# Altium PCB Sexy Rodent.PcbDoc (part 1 of 3)
Units mm, origin at the board's own origin, x right, y up, seen from the top; angles counter-clockwise.
Board outline 59.05 x 84.85 mm, 2 copper layers (Top Layer, Bottom Layer); 67 components, 41 nets, 178 pads, 206 vias.
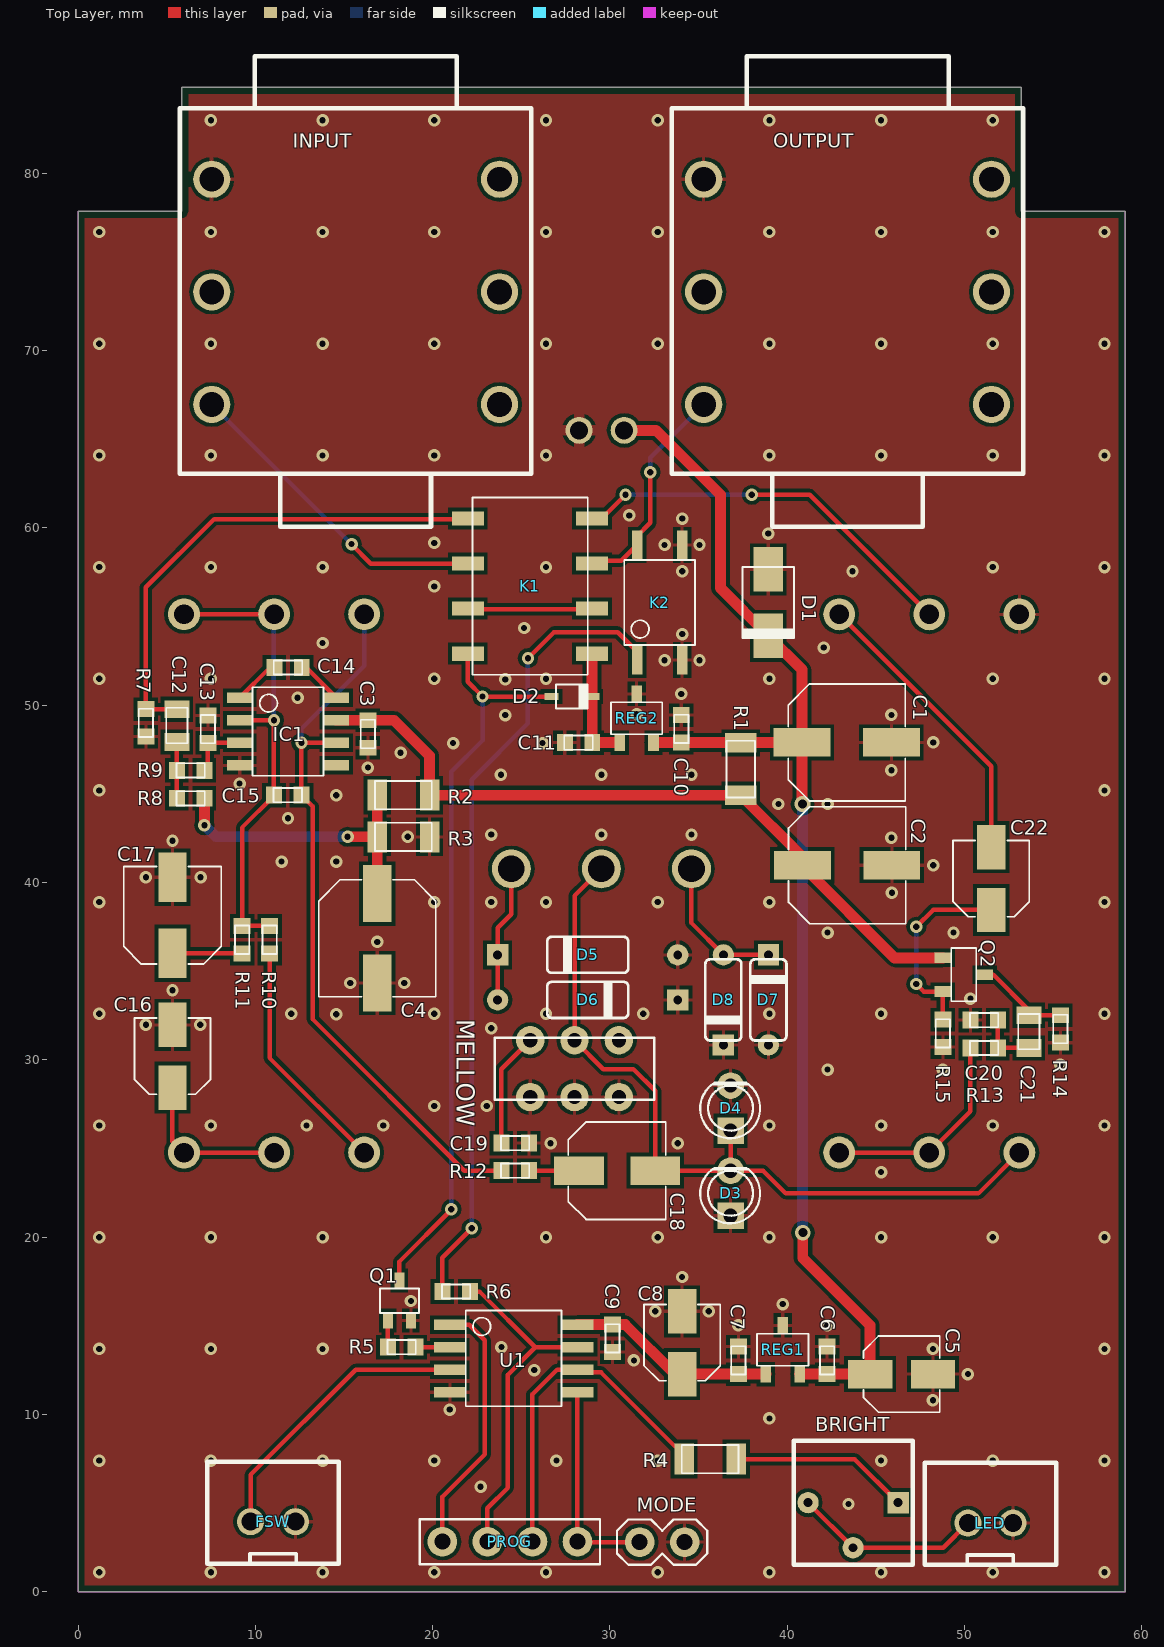
[diagram p0: Top Layer view]
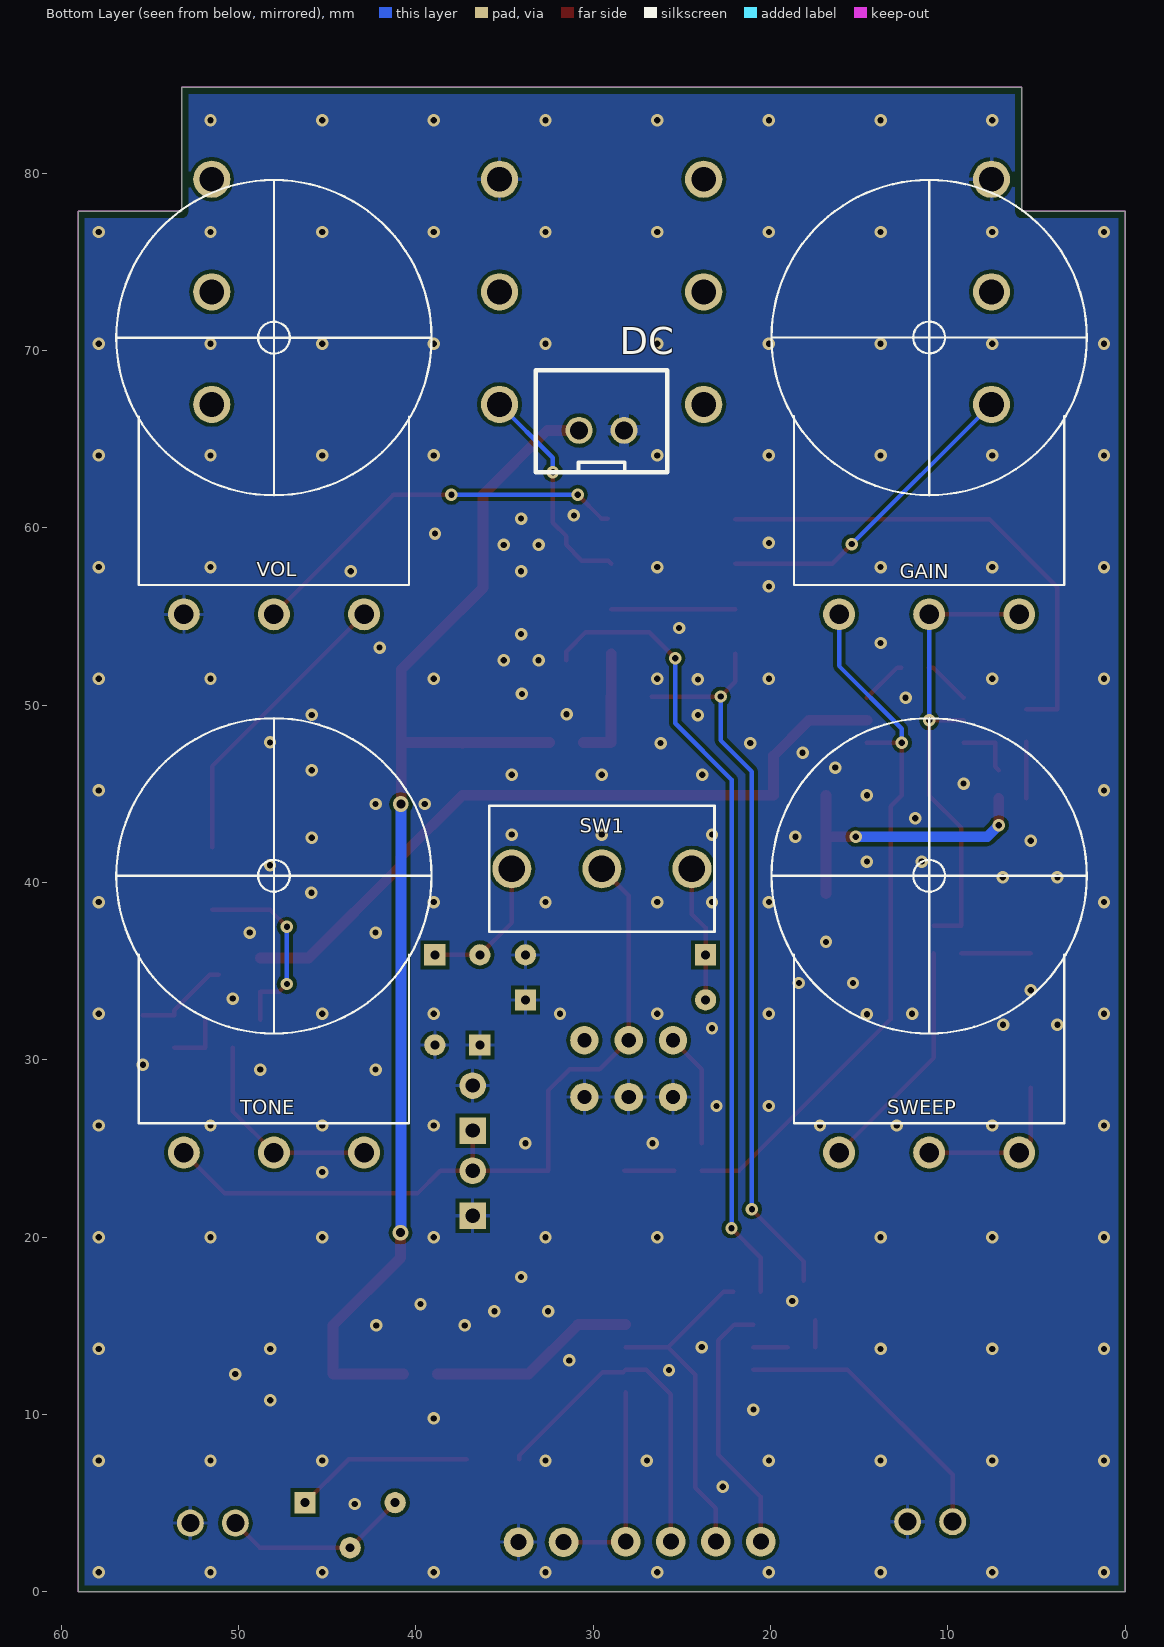
[diagram p1: Bottom Layer view, seen from below]
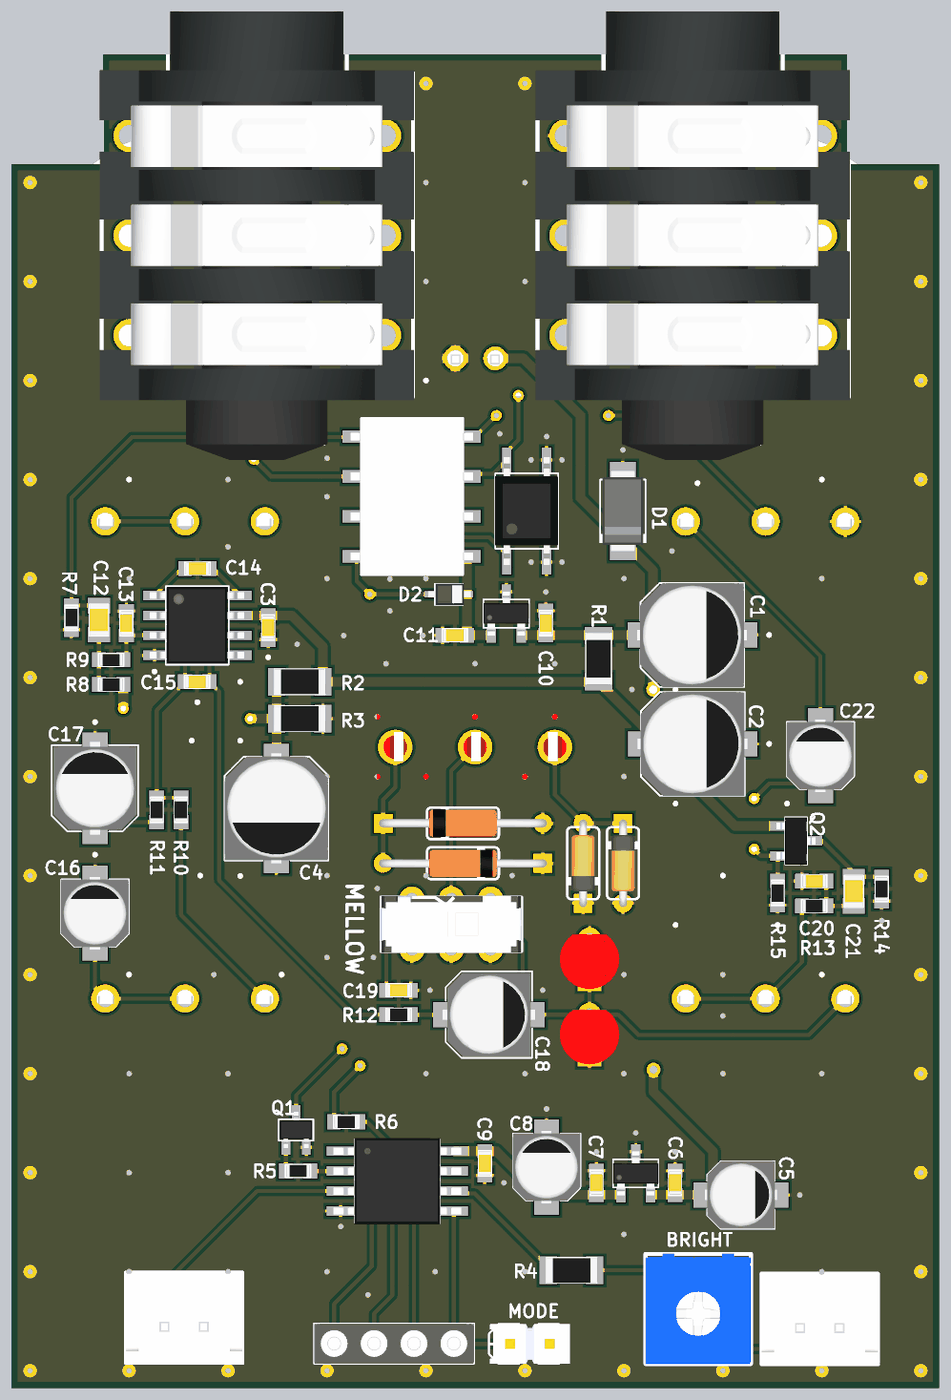
[diagram p2: 3D render of the assembled board from above, using the file's embedded part models]
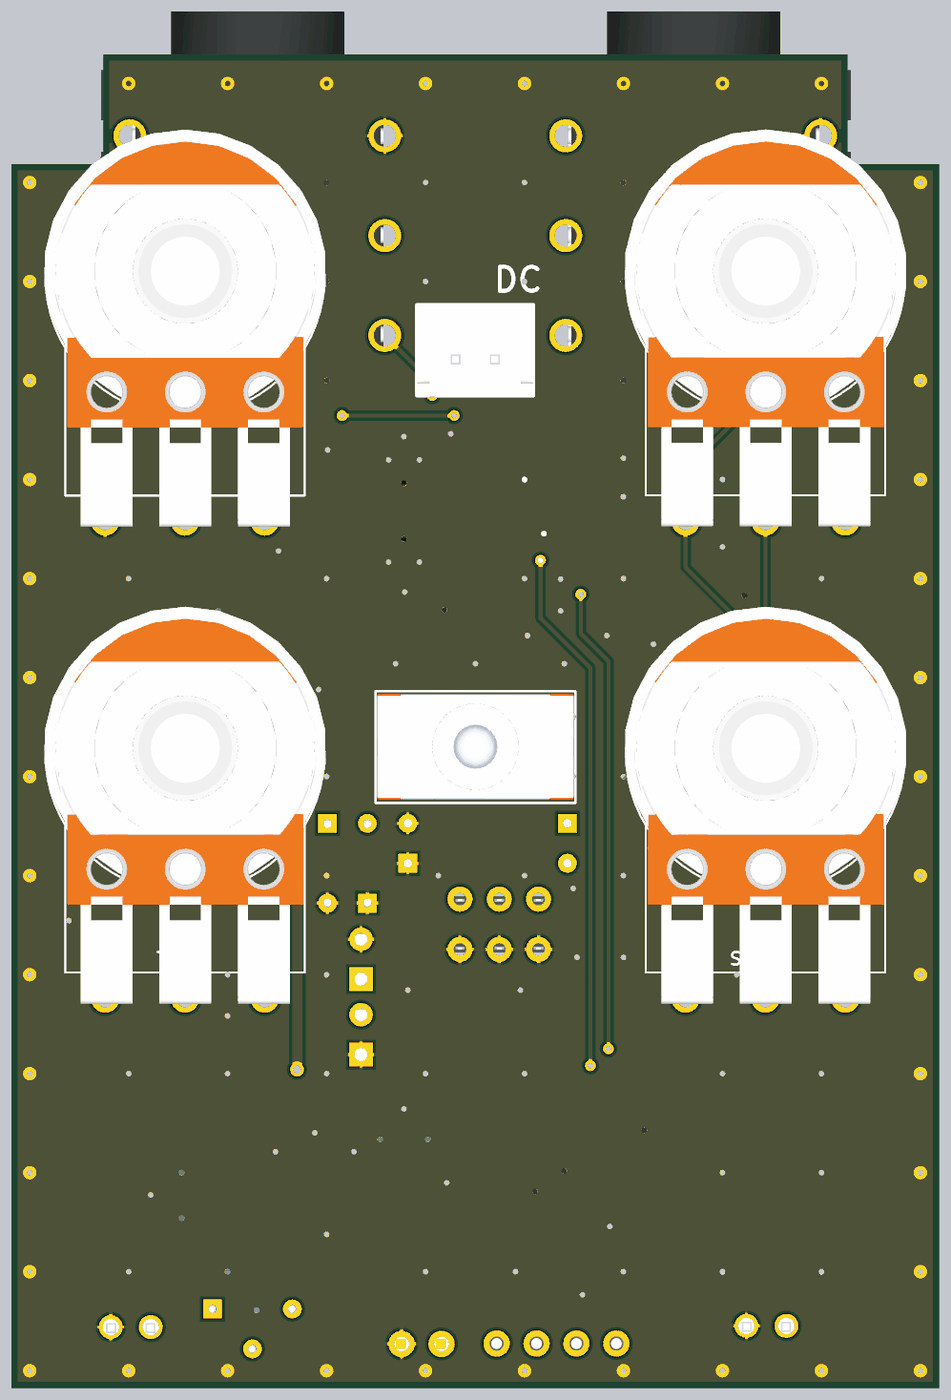
[diagram p3: 3D render of the assembled board from below, using the file's embedded part models]

## Layer stack, top to bottom
Top Solder: solder mask 0.0102, Solder Resist, Dk 3.5
Top Layer: signal copper 0.0356
Dielectric 1: dielectric 0.32, FR-4, Dk 4.8
Bottom Layer: signal copper 0.0356
Bottom Solder: solder mask 0.0102, Solder Resist, Dk 3.5

## Board outline
53.204,84.841 53.204,77.856 59.055,77.856 59.055,-0.011 0,-0.011 0,77.856 5.842,77.856 5.842,84.841

## Design rules (kind name [scope] priority, off if disabled: settings)
BoardOutlineClearance BottomOverlay [OnLayer('Bottom Overlay')] p1: gap=0 ignorepadtopadclearanceinfootprint=FALSE
BoardOutlineClearance TopOverlay [OnLayer('Top Overlay')] p2: gap=0 ignorepadtopadclearanceinfootprint=FALSE
BoardOutlineClearance [All] p3: gap=0.381 ignorepadtopadclearanceinfootprint=FALSE
Clearance [All] p1: gap=0.203 ignorepadtopadclearanceinfootprint=FALSE except(0: Arc-Text Arc-Hole Track-Text Track-Hole SMDPad-Text SMDPad-Hole THPad-Text THPad-Hole Via-Text Via-Hole Fill-Text Fill-Hole Poly-Text Poly-Hole Region-Text Region-Hole Text-Text Text-Hole)
ComponentClearance [All] p1 off: gap=0.025 collisioncheckmode=3 verticalgap=0.025 showdistances=FALSE
DiffPairsRouting [All] p1: maxlimit=10 minlimit=0.152 mostfreqgap=0.203 toplayer_minwidth=0.152 toplayer_maxwidth=0.381 toplayer_prefwidth=0.203 bottomlayer_minwidth=0.152 bottomlayer_maxwidth=0.381 bottomlayer_prefwidth=0.203 maxuncoupledlength=12.7
Height [All] p1 off: minheight=0 maxheight=25.4 prefheight=12.7
HoleSize [All] p1: absolutevalues=TRUE maxlimit=6.731 minlimit=0.3 maxpercent=80.000 minpercent=20.000
HoleToHoleClearance [All] p1: gap=0.254 allowstackedmicrovias=FALSE
MinimumAnnularRing [All] p1: minimumring=0.152
MinimumSolderMaskSliver [All] p1: minsoldermaskwidth=0
PlaneClearance [All] p1: clearance=0.254
PlaneConnect [All] p1: planeconnectstyle=Direct reliefexpansion=0.406 reliefentries=4 reliefconductorwidth=0.152 reliefairgap=0.152
PolygonConnect PolygonConnect_J1 [InComponent ('J1')  Or InComponent ('DC')] p1: connectstyle=Relief reliefconductorwidth=0.61 reliefentries=4 polygonreliefangle="90 Angle" airgapwidth=0.203
PolygonConnect [All] p2: thpad.connectstyle=Relief thpad.reliefconductorwidth=0.203 thpad.reliefentries=4 thpad.polygonreliefangle="90 Angle" thpad.airgapwidth=0.203 smdpad.connectstyle=Relief smdpad.reliefconductorwidth=0.203 smdpad.reliefentries=4 smdpad.polygonreliefangle="90 Angle" smdpad.airgapwidth=0.203 via.connectstyle=Direct via.reliefconductorwidth=0.203 via.reliefentries=4 via.polygonreliefangle="90 Angle" via.airgapwidth=0.203
RoutingCorners [All] p1: cornerstyle=45-Degree minsetback=1.25 maxsetback=1.25
RoutingVias [All] p1: holewidth=0.35 width=0.7 viastyle="Through Hole" minholewidth=0.35 minwidth=0.7 maxholewidth=2.54 maxwidth=2.896
SilkToSilkClearance [All] p1 off: silktosilkclearance=0
SilkToSolderMaskClearance [IsPad] p1 off: minsilkscreentomaskgap=0.152 clearancetoexposedcopper=TRUE
SolderMaskExpansion [All] p1: expansion=0.075
Width [All] p1: maxlimit=0.61 minlimit=0.254 preferedwidth=0.254 minimp=50.000000 maximp=50.000000 favimp=50.000000
19 further rules are at their usual default settings.

## Components (designator, comment, footprint, x,y, rotation, side; value= is the part's Value field where it differs from the comment)
BRIGHT "10kB" BOURNS_3362P 43.717,5.024 r180 top
C1 "100u" CAPAE_D 43.35,47.9 r0 top
C2 "100u" CAPAE_D 43.375,40.975 r0 top
C3 "100n" CHIP_0603 16.35,48.375 r270 top
C4 "47u" CAPAE_D 16.875,36.854 r270 top
C5 "10u" CAPAE_B 46.442,12.274 r0 top
C6 "100n" CHIP_0603 42.242,13.049 r90 top
C7 "100n" CHIP_0603 37.242,13.049 r90 top
C8 "10u" CAPAE_B 34.067,14.046 r90 top
C9 "100n" CHIP_0603 30.142,14.289 r270 top
C10 "100n" CHIP_0603 34.02,48.664 r90 top
C11 "100n" CHIP_0603 28.225,47.889 r180 top
C12 "22n" CHIP_0805 5.575,48.85 r90 top
C13 "1n" CHIP_0603 7.325,48.65 r90 top
C14 "30p" CHIP_0603 11.842,52.125 r180 top
C15 "100p" CHIP_0603 11.825,44.925 r180 top
C16 "2.2u" CAPAE_B 5.327,30.202 r90 top
C17 "4.7u" CAPAE_C 5.325,38.15 r90 top
C18 "4.7u" CAPAE_C 30.4,23.75 r0 top
C19 "10n" CHIP_0603 24.65,25.3 r0 top
C20 "3.3n" CHIP_0603 51.1,32.241 r180 top
C21 "22n" CHIP_0805 53.625,31.591 r270 top
C22 "1u" CAPAE_B 51.5,40.222 r90 top
D1 "S1A" DO214 38.925,55.789 r90 top
D2 "1N4148WS" SOD323 27.85,50.489 r180 top
D3 "D_LED" LED_3MM 36.8,22.475 r90 top
D4 "D_LED" LED_3MM 36.8,27.275 r90 top
D5 "1N34A" DO7_4 28.744,35.919 r0 top
D6 "1N34A" DO7_4 28.744,33.379 r180 top
D7 "1N4148" DO35_2 38.934,33.379 r270 top
D8 "1N4148" DO35_2 36.394,33.379 r90 top
DC "J_JST-XH-02" JST-XH-02 29.53,65.5 r180 bottom
FSW "J_JST-XH-02" JST-XH-02 10.997,3.949 r0 top
GAIN "100kA" ALPHA_16mm_BOTTOM 11.055,55.113 r180 bottom locked
IC1 "OP07" SO-8 11.842,48.514 r0 top
INPUT "J_STEREO" STEREO 15.656,73.309 r90 top locked
K1 "G6K" G6K 25.6,56.714 r180 top
K2 "TLP175A" TLP175A 32.8,55.789 r90 top
LED "J_JST-XH-02" JST-XH-02 51.455,3.874 r0 top
MELLOW "DPDT" DPDT_SLIDE 23.5,27.75 r0 top
MODE "" HEADER_2PINS 32.942,2.799 r0 top
OUTPUT "J_STEREO" STEREO 43.399,73.309 r90 top locked
PROG "J_HEADER_4PINS_FEM" HEADER_4Pins_FEM 21.817,2.824 r0 top
Q1 "MBT2222A" SOT323 18.125,16.425 r90 top
Q2 "MMBJ201" SOT23 49.95,34.8 r0 top
R1 "47R" CHIP_R_1206 37.375,46.4 r270 top
R2 "100k" CHIP_R_1206 18.35,44.925 r180 top
R3 "100k" CHIP_R_1206 18.35,42.575 r180 top
R4 "220R" CHIP_R_1206 35.651,7.482 r0 top
R5 "20k" CHIP_R_0603 18.25,13.8 r180 top
R6 "1k" CHIP_R_0603 21.32,16.932 r180 top
R7 "2.2M" CHIP_R_0603 3.825,49 r90 top
R8 "2.2M" CHIP_R_0603 6.35,44.75 r0 top
R9 "1k" CHIP_R_0603 6.35,46.325 r0 top
R10 "47R" CHIP_R_0603 10.8,36.775 r90 top
R11 "560R" CHIP_R_0603 9.25,36.775 r90 top
R12 "1k" CHIP_R_0603 24.65,23.75 r0 top
R13 "1.5k" CHIP_R_0603 51.1,30.666 r0 top
R14 "1M" CHIP_R_0603 55.4,31.739 r90 top
R15 "10k" CHIP_R_0603 48.775,31.489 r90 top
REG1 "78L05" SOT23-3 39.742,13.649 r90 top
REG2 "78L05" SOT23-3 31.5,49.264 r90 top
SW1 "SPDT" SPDT 29.515,40.772 r0 bottom locked
SWEEP "1kB" ALPHA_16mm_BOTTOM 11.055,24.754 r180 bottom locked
TONE "100kA" ALPHA_16mm_BOTTOM 48.006,24.754 r180 bottom locked
U1 "ATTINY85" SOP8 24.567,13.159 r0 top
VOL "100kA" ALPHA_16mm_BOTTOM 48.006,55.107 r180 bottom locked

## Footprints (in the part's own frame and the unit in brackets; to place one, negate y for a bottom-side part, rotate by r counter-clockwise, add the part's x,y. Pads: shape width x height; smd on the part's side, far side on the other; paste and mask are expansions set on the pad)
ALPHA_16mm_BOTTOM [mm]
  round 1.8 hole 1.1: 1(-5.08,0.016) 2(0,0.016) 3(5.08,0.016)
  silkscreen extent -8.89,1.67 8.89,24.51, body extent -8.99,-0.31 11.3,24.95, height 27.09
BOURNS_3362P [mm]
  rect 1.2x1.2 hole 0.5: 1(-2.534,0)
  round 1.2 hole 0.5: 2(0.006,2.54) 3(2.546,0)
  silkscreen extent -3.35,-3.51 3.35,3.49, body extent -3.35,-3.53 3.35,3.51, height 4.88
CAPAE_B [mm] "Aluminum Electrolytic Capacitor, Body 4.30x4.30x5.40mm, IPC Low Density"
  rect 2.5x1.6 smd: +(-1.772,0) -(1.772,0)
  silkscreen extent -2.15,-2.15 2.15,2.15, body extent -2.3,-2.14 2.3,2.16, height 5.41
CAPAE_C [mm] "Aluminum Electrolytic Capacitor, Body 5.30x5.30x5.40mm, IPC Low Density"
  rect 2.8x1.6 smd: +(-2.147,0) -(2.147,0)
  silkscreen extent -2.75,-2.75 2.75,2.75, body extent -2.95,-2.65 2.95,2.65, height 5.41
CAPAE_D [mm] "Aluminum Electrolytic Capacitor, Body 6.60x6.60x5.40mm, IPC Low Density"
  rect 3.2x1.6 smd: +(-2.521,0) -(2.521,0)
  silkscreen extent -3.3,-3.3 3.3,3.3, body extent -3.53,-3.3 3.47,3.3, height 5.41
CHIP_0603 [mm] "Chip Capacitor, 2-Leads, Body 1.60x0.80mm, IPC Medium Density"
  rect 0.9x0.95 smd: 1(-0.775,0) 2(0.775,0)
  silkscreen extent -0.8,-0.4 0.8,0.4, body extent -0.75,-0.4 0.75,0.4, height 0.65
CHIP_0805 [mm] "Chip Capacitor, 2-Leads, Body 2.00x1.25mm, IPC Medium Density"
  rect 1x1.4 smd: 1(-0.925,0) 2(0.925,0)
  silkscreen extent -1,-0.6 1,0.6, body extent -1,-0.6 1,0.6, height 0.7
CHIP_R_0603 [mm] "Chip Resistor, 2-Leads, Body 1.60x0.80mm, IPC Medium Density"
  rect 0.9x0.95 smd: 1(-0.775,0) 2(0.775,0)
  silkscreen extent -0.8,-0.4 0.8,0.4, body extent -0.75,-0.4 0.75,0.4, height 0.63
CHIP_R_1206 [mm] "Chip Resistor 2-Leads, Body 3.20x1.60mm, IPC Medium Density"
  rect 1.1x1.75 smd: 1(-1.475,0) 2(1.475,0)
  silkscreen extent -1.6,-0.8 1.6,0.8, body extent -1.65,-0.8 1.65,0.8, height 0.76
DO7_4 [mm]
  round 1.2 hole 0.5: A(5.08,0)
  rect 1.2x1.2 hole 0.5: C(-5.08,0)
  silkscreen extent -2.29,-1.02 2.29,1.02, body extent -5.35,-0.86 5.35,0.89, height 1.77
DO35_2 [mm]
  round 1.2 hole 0.5: A(2.54,0)
  rect 1.2x1.2 hole 0.5: C(-2.54,0)
  silkscreen extent -2.29,-1.02 2.29,1.02, body extent -2.75,-0.75 2.75,0.75, height 1.51
DO214 [mm] "Molded Diode, 2-Leads, Body 4.30x2.63mm, IPC Medium Density"
  rect 2.5x1.65 smd: 1(-1.875,0) 2(1.875,0)
  silkscreen extent -2,-1.45 2,1.45, body extent -2.6,-1.3 2.6,1.3, height 2.4
DPDT_SLIDE [mm]
  round 1.6 hole 0.8: A1(2,3.35) A2(4.5,3.35) A3(7,3.35) B1(2,0.15) B2(4.5,0.15) B3(7,0.15)
  silkscreen extent 0,0 9,3.5, body extent 0,-0.05 9,3.55, height 5.5
G6K [mm]
  rect 1.8x0.8 smd: 1(-3.386,3.81) 2(-3.386,1.27) 3(-3.386,-1.27) 4(-3.386,-3.81) 5(3.614,-3.81) 6(3.614,-1.27) 7(3.614,1.27) 8(3.614,3.81)
  silkscreen extent -3.15,-5 3.35,5, body extent -3.8,-5 4,5, height 5.2
HEADER_2PINS [mil]
  round 66 hole 35.43: 1(50,0) 2(-50,0)
  silkscreen extent -100,-50 100,50, body extent -102,-50 102,50, height 330
HEADER_4Pins_FEM [mil]
  round 66 hole 35.43: 1(-50,0) 2(50,0) 3(150,0) 4(250,0)
  silkscreen extent -100,-50 300,50, body extent -100,-50 300,50, height 237
JST-XH-02 [mil]
  round 60 hole 40: 1(-50,0) 2(50,0)
  silkscreen extent -146,-93 146,134, body extent -146,-95 146,131, height 276
LED_3MM [mil]
  rect 59.06x59.06 hole 31.5: ANODE(-50,0)
  round 59.06 hole 31.5: P$1(50,0)
  silkscreen extent -67,-65 56,67, body extent -75,-75 160,75, height 221
SO-8 [mm] "SOIC, 8-Leads, Body 4.90x3.90mm, Pitch 1.27mm, IPC Medium Density"
  rect 1.45x0.6 smd: 1(-2.725,1.905) 2(-2.725,0.635) 3(-2.725,-0.635) 4(-2.725,-1.905) 5(2.725,-1.905) 6(2.725,-0.635) 7(2.725,0.635) 8(2.725,1.905)
  silkscreen extent -2,-2.5 2,2.5, body extent -3.02,-2.45 2.98,2.45, height 1.75
SOD323 [mm] "SODFL, 2-Leads, Body 1.25x2.50mm, IPC Medium Density"
  rect 0.8x0.4 smd: 1(-1.15,0) 2(1.15,0)
  silkscreen extent -0.9,-0.68 0.9,0.67, body extent -1.4,-0.68 1.3,0.67, height 0.79
SOP8 [mm] "SOP, 8-Leads, Body 5.24x5.29mm, Pitch 1.27mm, IPC Medium Density"
  rect 1.8x0.6 smd: 1(-3.6,1.905) 2(-3.6,0.635) 3(-3.6,-0.635) 4(-3.6,-1.905) 5(3.6,-1.905) 6(3.6,-0.635) 7(3.6,0.635) 8(3.6,1.905)
  silkscreen extent -2.7,-2.7 2.7,2.7, body extent -4.07,-2.74 4.07,2.74, height 1.9
SOT23 [mm] "SOT23, 3-Leads, Body 2.90x2.35mm, Pitch 0.95mm, IPC Medium Density"
  rect 0.95x0.6 smd: 1(-1.175,0.95) 2(-1.175,-0.95) 3(1.175,0)
  silkscreen extent -0.7,-1.5 0.7,1.5, body extent -1.25,-1.5 1.25,1.5, height 1.05
SOT23-3 [mm] "SOT23, 3-Leads, Body 2.80x2.80mm, Pitch 0.95mm, IPC Medium Density"
  rect 0.95x0.6 smd: 1(-1.375,0.95) 2(-1.375,-0.95) 3(1.375,0)
  silkscreen extent -0.9,-1.45 0.9,1.45, body extent -1.4,-1.45 1.4,1.45, height 1.3
SOT323 [mm] "SOT23, 3-Leads, Body 2.00x2.20mm, Pitch 0.65mm, IPC Medium Density"
  rect 0.9x0.55 smd: 1(-1.125,0.65) 2(-1.125,-0.65) 3(1.125,0)
  silkscreen extent -0.7,-1.1 0.67,1.1, body extent -1.15,-1.05 1.15,1.05, height 1
SPDT [mm]
  round 2.2 hole 1.5: 1(5.08,0) 2(0,0) 3(-5.08,0)
  silkscreen extent -6.35,-3.56 6.35,3.56, body extent -6.25,-3.68 6.25,3.33, height 28.27
STEREO [mm]
  round 2.1 hole 1.4: R(0,8.115) RN(0,-8.115) S(6.35,8.115) SN(6.35,-8.115) T(-6.35,8.115) TN(-6.35,-8.115)
  silkscreen extent -13.25,-9.91 13.3,9.91, body extent -14.28,-9.97 14.28,10.03, height 15.5
TLP175A [mm] "SOP, 4-Leads, Body 3.75x4.60mm, Pitch 2.54mm, IPC Medium Density"
  rect 1.6x0.6 smd: 1(-3.25,1.27) 3(-3.25,-1.27) 4(3.25,-1.27) 6(3.25,1.27)
  silkscreen extent -2.4,-2 2.4,2, body extent -3.43,-2 3.43,2, height 2.02

## Part data
BRIGHT: library part TRIM_10kB_3362P, "10k Lin 3362P trimmer", Price=0.1
C1 C2: library part MCVVT025M101EA6L, "CAP ALUM 100UF 25V SMD", Capacitance=100uF, Manufacturer=Multicomp, Max Operating Temperature=105°C, Min Operating Temperature=-55°C, Ripple Current (AC)=6.3mA, Supplier Part Number 1=2611370, Voltage Rating=25V, ComponentLink1Description=http://www.farnell.com/datasheets/2151198.pdf?src-supplier=Element14, ComponentLink1URL=http://www.farnell.com/datasheets/2151198.pdf?src-supplier=Element14, Diameter=6.3mm, Height=7.7mm, Life (Hours)=2000Hour, Manufacturer Part Number=MCVVT025M101EA6L, Packaging="Tape and Reel", Price=0.102, Pricing="1=0.157, 50=0.104, 100=0.0932, 250=0.0801, 500=0.0681 (EUR)", REACH SVHC="No SVHC", RoHS=No, Stock=1063, Supplier 1=Farnell, Voltage Rating (DC)=25V
C3 C6 C7 C9 C10 C11: library part MC0603B104K500CT, "CAP CER 100NF 50V X7R 0603", Capacitance=100nF, Case/Package=0603, Case Code (Metric)=1608, Dielectric=X7R, Manufacturer=Multicomp, Max Operating Temperature=125°C, Min Operating Temperature=-55°C, Supplier Part Number 1=1759122, Tolerance=10%, Voltage Rating=50V, Case Code (Imperial)=0603, ComponentLink1Description=https://datasheet.ciiva.com/22686/1901289-22686278.pdf?src-supplier=Element14, ComponentLink1URL=https://datasheet.ciiva.com/22686/1901289-22686278.pdf?src-supplier=Element14, ComponentLink2Description=https://datasheet.ciiva.com/22686/1901289-22686279.pdf?src-supplier=Element14, ComponentLink2URL=https://datasheet.ciiva.com/22686/1901289-22686279.pdf?src-supplier=Element14, ComponentLink3Description=https://datasheet.ciiva.com/22648/1901289-22648411.pdf?src-supplier=Element14, ComponentLink3URL=https://datasheet.ciiva.com/22648/1901289-22648411.pdf?src-supplier=Element14, Manufacturer Part Number=MC0603B104K500CT, Number of Pins=2, Packaging="Cut Tape", Price=0.0458, REACH SVHC=Unknown, RoHS=Yes, Stock 1=1057763, Supplier 1=Farnell, Voltage Rating (DC)=50V
C4: library part MCVVT025M470EA1L, "CAP ALUM 47UF 25V SMD", Capacitance=47uF, Manufacturer=Multicomp, Max Operating Temperature=105°C, Min Operating Temperature=-55°C, Ripple Current (AC)=6.3mA, Supplier Part Number 1=2611377, Voltage Rating=25V, ComponentLink1Description=http://www.farnell.com/datasheets/2151198.pdf?src-supplier=Farnell, ComponentLink1URL=http://www.farnell.com/datasheets/2151198.pdf?src-supplier=Farnell, ComponentLink2Description=http://www.farnell.com/datasheets/2151198.pdf?src-supplier=Element14, ComponentLink2URL=http://www.farnell.com/datasheets/2151198.pdf?src-supplier=Element14, Diameter=6.3mm, Height=5.4mm, Life (Hours)=2000Hour, Manufacturer Part Number=MCVVT025M470EA1L, Packaging="Cut Tape", Price=0.0825, Pricing="1=0.125, 50=0.0825, 100=0.0741, 250=0.0637, 500=0.0542 (EUR)", REACH SVHC="No SVHC", RoHS=No, Stock=1436, Supplier 1=Farnell, Voltage Rating (DC)=25V
C5 C8: library part MCVVT025M100CA1L, "CAP ALUM 10UF 25V SMD", Capacitance=10uF, Manufacturer=Multicomp, Max Operating Temperature=105°C, Min Operating Temperature=-55°C, Ripple Current (AC)=4mA, Supplier Part Number 1=2611368, Voltage Rating=25V, ComponentLink1Description=http://www.farnell.com/datasheets/2151198.pdf?src-supplier=Element14, ComponentLink1URL=http://www.farnell.com/datasheets/2151198.pdf?src-supplier=Element14, Diameter=4mm, Height=5.4mm, Life (Hours)=2000Hour, Manufacturer Part Number=MCVVT025M100CA1L, Packaging="Cut Tape", Price=0.0592, Pricing="5=0.0897, 50=0.0592, 250=0.0457, 500=0.0388, 1000=0.0338 (EUR)", REACH SVHC="No SVHC", RoHS=No, Stock=2773, Supplier 1=Farnell, Voltage Rating (DC)=25V
C12 C21: library part GRM21B5C1H223JA01L, "CAP CER 22NF 50V C0G/NP0 0805", Capacitance=22nF, Case/Package=0805, Case Code (Metric)=2012, Dielectric=C0G, Manufacturer=Murata, Max Operating Temperature=125°C, Min Operating Temperature=-55°C, Package Quantity=1, Supplier Part Number 1=1828943, Temperature Coefficient=30ppm/°C, Tolerance=5%, Voltage=25V, Voltage Rating=50V, Case Code (Imperial)=0805, ComponentLink1Description=https://datasheet.ciiva.com/2989/product-2989681.pdf?src-supplier=Avnet, ComponentLink1URL=https://datasheet.ciiva.com/2989/product-2989681.pdf?src-supplier=Avnet, ComponentLink2Description=https://datasheet.ciiva.com/29042/1858738-29042965.pdf?src-supplier=Jameco, ComponentLink2URL=https://datasheet.ciiva.com/29042/1858738-29042965.pdf?src-supplier=Jameco, ComponentLink3Description=https://datasheet.ciiva.com/3777/99grm21b5c1h223ja0123-3777023.pdf?src-supplier=Arrow, ComponentLink3URL=https://datasheet.ciiva.com/3777/99grm21b5c1h223ja0123-3777023.pdf?src-supplier=Arrow, ComponentLink4Description=https://datasheet.ciiva.com/29200/453051-da-01-en-vs-kondensator-0805-29200670.pdf?src-supplier=Conrad, ComponentLink4URL=https://datasheet.ciiva.com/29200/453051-da-01-en-vs-kondensator-0805-29200670.pdf?src-supplier=Conrad, ComponentLink5Description=https://datasheet.ciiva.com/138/partnumbering-e-01-138787.pdf?src-supplier=Digi-Key, ComponentLink5URL=https://datasheet.ciiva.com/138/partnumbering-e-01-138787.pdf?src-supplier=Digi-Key, ComponentLink6Description=https://datasheet.ciiva.com/138/partnumbering-e-01-138789.pdf?src-supplier=Digi-Key, ComponentLink6URL=https://datasheet.ciiva.com/138/partnumbering-e-01-138789.pdf?src-supplier=Digi-Key, ComponentLink7Description=https://datasheet.ciiva.com/22703/608985-22703464.pdf?src-supplier=Element14, ComponentLink7URL=https://datasheet.ciiva.com/22703/608985-22703464.pdf?src-supplier=Element14, ComponentLink8Description=https://datasheet.ciiva.com/7828/608985-7828990.pdf?src-supplier=Element14, ComponentLink8URL=https://datasheet.ciiva.com/7828/608985-7828990.pdf?src-supplier=Element14, ComponentLink9Description=https://datasheet.ciiva.com/138/partnumbering-e-01-138788.pdf?src-supplier=Digi-Key, ComponentLink9URL=https://datasheet.ciiva.com/138/partnumbering-e-01-138788.pdf?src-supplier=Digi-Key, Depth=1.25mm, Height=1.25mm, Lead Free="Lead Free", Length=2mm, Manufacturer Part Number=GRM21B5C1H223JA01L, Material=Ceramic, Mount="Surface Mount", Number of Pins=2, Packaging="Tape and Reel", Price=0.191, Pricing 1="5 = 0.38000, 50 = 0.19100, 250 = 0.16400, 500 = 0.10400, 1500 = 0.08380 (EUR)", Radiation Hardening=No, REACH SVHC="No SVHC", RoHS=Yes, Stock 1=85144, Supplier 1=Farnell, Termination=SMD/SMT, Thickness=0.053inch, Voltage Rating (DC)=50V, Width=0.049inch
C13: library part GRM1885C1H102JA01D, "CAP CER 1NF 50V C0G/NP0 0603", Capacitance=1nF, Case/Package=0603, Case Code (Metric)=1608, Dielectric=C0G, Dielectric Material=Ceramic, Insulation Resistance=10GR, Manufacturer=Murata, Max Operating Temperature=125°C, Min Operating Temperature=-55°C, Package Quantity=1, Supplier Part Number 1=8819920, Temperature Coefficient=30ppm/°C, Tolerance=5%, Voltage=50V, Case Code (Imperial)=0603, ComponentLink1Description=https://datasheet.ciiva.com/18184/getdatasheetpartid-153109-18184812.pdf?src-supplier=Verical, ComponentLink1URL=https://datasheet.ciiva.com/18184/getdatasheetpartid-153109-18184812.pdf?src-supplier=Verical, ComponentLink2Description=https://datasheet.ciiva.com/29149/450301-da-01-en-vs-kondensator-0603-29149020.pdf?src-supplier=Conrad, ComponentLink2URL=https://datasheet.ciiva.com/29149/450301-da-01-en-vs-kondensator-0603-29149020.pdf?src-supplier=Conrad, ComponentLink3Description=https://datasheet.ciiva.com/5421/product-5421450.pdf?src-supplier=Mouser, ComponentLink3URL=https://datasheet.ciiva.com/5421/product-5421450.pdf?src-supplier=Mouser, ComponentLink4Description=https://datasheet.ciiva.com/131/partnumbering-e-01-131963.pdf?src-supplier=Digi-Key, ComponentLink4URL=https://datasheet.ciiva.com/131/partnumbering-e-01-131963.pdf?src-supplier=Digi-Key, ComponentLink5Description=https://datasheet.ciiva.com/131/partnumbering-e-01-131964.pdf?src-supplier=Digi-Key, ComponentLink5URL=https://datasheet.ciiva.com/131/partnumbering-e-01-131964.pdf?src-supplier=Digi-Key, ComponentLink6Description=https://datasheet.ciiva.com/6072/4360-6072460.pdf?src-supplier=Farnell, ComponentLink6URL=https://datasheet.ciiva.com/6072/4360-6072460.pdf?src-supplier=Farnell, ComponentLink7Description=https://datasheet.ciiva.com/131/partnumbering-e-01-131965.pdf?src-supplier=Digi-Key, ComponentLink7URL=https://datasheet.ciiva.com/131/partnumbering-e-01-131965.pdf?src-supplier=Digi-Key, ComponentLink8Description=https://datasheet.ciiva.com/7828/1784402-7828893.pdf?src-supplier=Element14, ComponentLink8URL=https://datasheet.ciiva.com/7828/1784402-7828893.pdf?src-supplier=Element14, ComponentLink9Description=https://datasheet.ciiva.com/7828/1784402-7828894.pdf?src-supplier=Element14, ComponentLink9URL=https://datasheet.ciiva.com/7828/1784402-7828894.pdf?src-supplier=Element14, ComponentLink10Description=https://datasheet.ciiva.com/7828/4360-7828895.pdf?src-supplier=Element14, ComponentLink10URL=https://datasheet.ciiva.com/7828/4360-7828895.pdf?src-supplier=Element14, Depth=0.8mm, Height=0.8mm, Lead Free="Lead Free", Length=1.6mm, Manufacturer Part Number=GRM1885C1H102JA01D, Material=Ceramic, Mount="Surface Mount", Number of Pins=2, Packaging="Tape and Reel", Price=0.0397, Pricing 1="10 = 0.08650, 100 = 0.03970, 500 = 0.02290, 1000 = 0.01860, 2000 = 0.01690 (EUR)", Radiation Hardening=No, REACH SVHC="No SVHC", RoHS=Yes, Stock 1=138332, Supplier 1=Farnell, Termination=SMD/SMT, Thickness=0.035inch, Voltage Rating=50V, Voltage Rating (DC)=50V, Width=0.8mm
C14: library part MC0603N300J500CT, "CAP CER 30PF 50V C0G/NP0 0603", Capacitance=30pF, Case Code (Imperial)=0603, Case Code (Metric)=1608, Dielectric=C0G, Manufacturer=Multicomp, Max Operating Temperature=125°C, Min Operating Temperature=-55°C, Supplier Part Number 1=2627466, Tolerance=5%, Voltage Rating=50V, ComponentLink1Description=http://www.farnell.com/datasheets/2117933.pdf?src-supplier=Farnell, ComponentLink1URL=http://www.farnell.com/datasheets/2117933.pdf?src-supplier=Farnell, ComponentLink2Description=http://www.farnell.com/datasheets/2117933.pdf?src-supplier=Element14, ComponentLink2URL=http://www.farnell.com/datasheets/2117933.pdf?src-supplier=Element14, ComponentLink3Description=http://www.farnell.com/datasheets/2117900.pdf?src-supplier=Element14, ComponentLink3URL=http://www.farnell.com/datasheets/2117900.pdf?src-supplier=Element14, Manufacturer Part Number=MC0603N300J500CT, Packaging="Cut Tape", Price=0.0251, Pricing="10=0.0361, 100=0.0245, 500=0.018, 1000=0.0143, 2000=0.0118 (EUR)", REACH SVHC="No SVHC", RoHS=No, Stock=0, Supplier 1=Farnell, Voltage Rating (DC)=50V
C15: library part MC0603N101J500CT, "CAP CER 100PF 50V C0G/NP0 0603", Capacitance=100pF, Case Code (Imperial)=0603, Case Code (Metric)=1608, Dielectric=C0G, Manufacturer=Multicomp, Max Operating Temperature=125°C, Min Operating Temperature=-55°C, Supplier Part Number 1=1759066, Tolerance=5%, Voltage Rating=50V, ComponentLink1Description=http://www.farnell.com/datasheets/1901289.pdf?src-supplier=Farnell, ComponentLink1URL=http://www.farnell.com/datasheets/1901289.pdf?src-supplier=Farnell, ComponentLink2Description=http://www.farnell.com/datasheets/1901289.pdf?src-supplier=Element14, ComponentLink2URL=http://www.farnell.com/datasheets/1901289.pdf?src-supplier=Element14, ComponentLink3Description=http://www.farnell.com/datasheets/1870456.pdf?src-supplier=Element14, ComponentLink3URL=http://www.farnell.com/datasheets/1870456.pdf?src-supplier=Element14, ComponentLink4Description=http://www.farnell.com/datasheets/1901289.pdf?src-supplier=Newark, ComponentLink4URL=http://www.farnell.com/datasheets/1901289.pdf?src-supplier=Newark, Manufacturer Part Number=MC0603N101J500CT, Packaging="Cut Tape", Price=0.0197, Pricing="10=0.0241, 100=0.0195, 500=0.0139, 1000=0.012, 2000=0.0095 (EUR)", REACH SVHC="No SVHC", RoHS=Yes, Stock=55061, Supplier 1=Farnell, Voltage Rating (DC)=50V
C16: library part EEEFC1H2R2R, "CAP ALUM 2.2UF 20% 50V LESR SMD", Capacitance=2.2uF, Case/Package=Radial, Dielectric Material=Aluminium, ESR (Equivalent Series Resistance)=5R, Leakage Current=3uA, Manufacturer=Panasonic, Max Operating Temperature=105°C, Min Operating Temperature=-40°C, Package Quantity=1, Ripple Current=30mA, Supplier Part Number 1=9694536, Tolerance=20%, Voltage=50V, ComponentLink1Description=https://datasheet.ciiva.com/19479/1984136-19479347.pdf?src-supplier=Jameco, ComponentLink1URL=https://datasheet.ciiva.com/19479/1984136-19479347.pdf?src-supplier=Jameco, ComponentLink2Description=https://datasheet.ciiva.com/11779/0900766b806bc525-11779434.pdf?src-supplier=RSComponents, ComponentLink2URL=https://datasheet.ciiva.com/11779/0900766b806bc525-11779434.pdf?src-supplier=RSComponents, ComponentLink3Description=https://datasheet.ciiva.com/29313/443525-da-01-en-smd-elko-vfc-b-2-2-uf-50v-29313785.pdf?src-supplier=Conrad, ComponentLink3URL=https://datasheet.ciiva.com/29313/443525-da-01-en-smd-elko-vfc-b-2-2-uf-50v-29313785.pdf?src-supplier=Conrad, ComponentLink4Description=https://datasheet.ciiva.com/2985/aba0000ce5-2985317.pdf?src-supplier=Avnet, ComponentLink4URL=https://datasheet.ciiva.com/2985/aba0000ce5-2985317.pdf?src-supplier=Avnet, ComponentLink5Description=https://datasheet.ciiva.com/24023/aba0000ce5-68492-24023637.pdf?src-supplier=Mouser, ComponentLink5URL=https://datasheet.ciiva.com/24023/aba0000ce5-68492-24023637.pdf?src-supplier=Mouser, ComponentLink6Description=https://datasheet.ciiva.com/14592/70068018-14592374.pdf?src-supplier=Allied+Electronics, ComponentLink6URL=https://datasheet.ciiva.com/14592/70068018-14592374.pdf?src-supplier=Allied+Electronics, ComponentLink7Description=https://datasheet.ciiva.com/43485/31718-43485414.pdf?src-supplier=Farnell, ComponentLink7URL=https://datasheet.ciiva.com/43485/31718-43485414.pdf?src-supplier=Farnell, ComponentLink8Description=https://datasheet.ciiva.com/28691/31718-28691033.pdf?src-supplier=Element14, ComponentLink8URL=https://datasheet.ciiva.com/28691/31718-28691033.pdf?src-supplier=Element14, ComponentLink9Description=https://datasheet.ciiva.com/30163/aba0000ce5-30163417.pdf?src-supplier=Onlinecomponents.com, ComponentLink9URL=https://datasheet.ciiva.com/30163/aba0000ce5-30163417.pdf?src-supplier=Onlinecomponents.com, ComponentLink10Description=https://datasheet.ciiva.com/17536/aba0000ce5-17536682.pdf?src-supplier=Avnet+Europe, ComponentLink10URL=https://datasheet.ciiva.com/17536/aba0000ce5-17536682.pdf?src-supplier=Avnet+Europe, ComponentLink11Description=https://datasheet.ciiva.com/48542/eeefc-series-eng-tds-48542746.pdf?src-supplier=Distrelec, ComponentLink11URL=https://datasheet.ciiva.com/48542/eeefc-series-eng-tds-48542746.pdf?src-supplier=Distrelec, ComponentLink12Description=https://datasheet.ciiva.com/14601/70256381-14601035.pdf?src-supplier=Allied+Electronics, ComponentLink12URL=https://datasheet.ciiva.com/14601/70256381-14601035.pdf?src-supplier=Allied+Electronics, ComponentLink13Description=https://datasheet.ciiva.com/46387/31718-46387979.pdf?src-supplier=Element14, ComponentLink13URL=https://datasheet.ciiva.com/46387/31718-46387979.pdf?src-supplier=Element14, ComponentLink14Description=https://datasheet.ciiva.com/46376/31718-46376381.pdf?src-supplier=Element14, ComponentLink14URL=https://datasheet.ciiva.com/46376/31718-46376381.pdf?src-supplier=Element14, ComponentLink15Description=https://datasheet.ciiva.com/6059/31718-6059966.pdf?src-supplier=Farnell, ComponentLink15URL=https://datasheet.ciiva.com/6059/31718-6059966.pdf?src-supplier=Farnell, ComponentLink16Description=https://datasheet.ciiva.com/14602/70256381-14602926.pdf?src-supplier=Allied+Electronics, ComponentLink16URL=https://datasheet.ciiva.com/14602/70256381-14602926.pdf?src-supplier=Allied+Electronics, Contact Plating=Tin, Diameter=4mm, Height=5.4mm, Height - Seated (Max)=0.213inch, Impedance=5R, Lead Free="Lead Free", Lead Length=1.8mm, Lead Pitch=1mm, Length=5.5mm, Life (Hours)=1000Hour, Manufacturer Part Number=EEEFC1H2R2R, Material=Aluminium, Mount="Surface Mount", Number of Pins=2, Packaging="Tape and Reel", Polarity=Polar, Price=0.0762, Pricing="5=0.155, 50=0.0772, 250=0.0662, 500=0.0643, 1000=0.0626, 2000=0.061, 10000=0.0594 (EUR)", Radiation Hardening=No, REACH SVHC="No SVHC", Ripple Current (AC)=30mA, RoHS=Yes, Stock=4255, Supplier 1=Farnell, Termination=SMD/SMT, Voltage Rating=50V, Voltage Rating (DC)=50V, Width=4.3mm
C17 C18: library part EEEFC1H4R7R, "CAP ALUM 4.7UF 50V LESR SMD", Capacitance=4.7uF, Case/Package=Radial, Dielectric Material=Aluminium, ESR (Equivalent Series Resistance)=3R, Leakage Current=3uA, Manufacturer=Panasonic, Max Operating Temperature=105°C, Min Operating Temperature=-40°C, Package Quantity=1, Ripple Current=50mA, Supplier Part Number 1=9694552, Tolerance=20%, Voltage=50V, ComponentLink1Description=https://datasheet.ciiva.com/11778/0900766b806bc525-11778368.pdf?src-supplier=RSComponents, ComponentLink1URL=https://datasheet.ciiva.com/11778/0900766b806bc525-11778368.pdf?src-supplier=RSComponents, ComponentLink2Description=https://datasheet.ciiva.com/6196/31718-6196262.pdf?src-supplier=Farnell, ComponentLink2URL=https://datasheet.ciiva.com/6196/31718-6196262.pdf?src-supplier=Farnell, ComponentLink3Description=https://datasheet.ciiva.com/30150/aba0000ce5-30150534.pdf?src-supplier=Onlinecomponents.com, ComponentLink3URL=https://datasheet.ciiva.com/30150/aba0000ce5-30150534.pdf?src-supplier=Onlinecomponents.com, ComponentLink4Description=https://datasheet.ciiva.com/48542/eeefc-series-eng-tds-48542743.pdf?src-supplier=Distrelec, ComponentLink4URL=https://datasheet.ciiva.com/48542/eeefc-series-eng-tds-48542743.pdf?src-supplier=Distrelec, ComponentLink5Description=https://datasheet.ciiva.com/14595/70256381-14595032.pdf?src-supplier=Allied+Electronics, ComponentLink5URL=https://datasheet.ciiva.com/14595/70256381-14595032.pdf?src-supplier=Allied+Electronics, ComponentLink6Description=https://datasheet.ciiva.com/43485/31718-43485416.pdf?src-supplier=Farnell, ComponentLink6URL=https://datasheet.ciiva.com/43485/31718-43485416.pdf?src-supplier=Farnell, ComponentLink7Description=https://datasheet.ciiva.com/24072/aba0000ce5-68492-24072137.pdf?src-supplier=Mouser, ComponentLink7URL=https://datasheet.ciiva.com/24072/aba0000ce5-68492-24072137.pdf?src-supplier=Mouser, ComponentLink8Description=https://datasheet.ciiva.com/14602/70256381-14602202.pdf?src-supplier=Allied+Electronics, ComponentLink8URL=https://datasheet.ciiva.com/14602/70256381-14602202.pdf?src-supplier=Allied+Electronics, ComponentLink9Description=https://datasheet.ciiva.com/46376/31718-46376378.pdf?src-supplier=Element14, ComponentLink9URL=https://datasheet.ciiva.com/46376/31718-46376378.pdf?src-supplier=Element14, ComponentLink10Description=https://datasheet.ciiva.com/14596/70068018-14596798.pdf?src-supplier=Allied+Electronics, ComponentLink10URL=https://datasheet.ciiva.com/14596/70068018-14596798.pdf?src-supplier=Allied+Electronics, Contact Plating=Tin, Diameter=5mm, Height=5.4mm, Height - Seated (Max)=0.213inch, Impedance=3R, Lead Free="Lead Free", Lead Length=2.2mm, Lead Pitch=1.5mm, Length=5.5mm, Life (Hours)=1000Hour, Manufacturer Part Number=EEEFC1H4R7R, Mount="Surface Mount", Number of Pins=2, Packaging="Tape and Reel", Price=0.27, Pricing 1="1 = 0.26900, 50 = 0.18200, 100 = 0.14200, 250 = 0.13200, 500 = 0.09890 (EUR)", Radiation Hardening=No, REACH SVHC="No SVHC", Ripple Current (AC)=50mA, RoHS=Yes, Stock 1=1971, Supplier 1=Farnell, Termination=SMD/SMT, Voltage Rating=50V, Voltage Rating (DC)=50V, Width=5.3mm
C19: library part GRM1885C1H103JA01D, "CAP CER 10NF 50V C0G/NP0 0603", Capacitance=10nF, Case/Package=0603, Case Code (Metric)=1608, Dielectric=C0G, Manufacturer=Murata, Max Operating Temperature=125°C, Min Operating Temperature=-55°C, Package Quantity=4000, Supplier Part Number 1=2456107, Tolerance=5%, Voltage=50V, Case Code (Imperial)=0603, ComponentLink1Description=https://datasheet.ciiva.com/29537/partnumbering-e-01-29537910.pdf?src-supplier=Digi-Key, ComponentLink1URL=https://datasheet.ciiva.com/29537/partnumbering-e-01-29537910.pdf?src-supplier=Digi-Key, ComponentLink2Description=https://datasheet.ciiva.com/41860/partnumbering-e-01-41860759.pdf?src-supplier=Digi-Key, ComponentLink2URL=https://datasheet.ciiva.com/41860/partnumbering-e-01-41860759.pdf?src-supplier=Digi-Key, Depth=0.8mm, Height=0.8mm, Lead Free="Lead Free", Lead Pitch=0.5mm, Length=1.6mm, Manufacturer Part Number=GRM1885C1H103JA01D, Material=Ceramic, Mount="Surface Mount", Packaging="Tape and Reel", Price=0.0723, Pricing 1="10 = 0.16600, 100 = 0.07230, 500 = 0.04810, 1000 = 0.04130, 2000 = 0.03640 (EUR)", REACH SVHC="No SVHC", RoHS=Yes, Stock 1=99456, Supplier 1=Farnell, Termination=SMD/SMT, Thickness=0.035inch, Voltage Rating=50V, Voltage Rating (DC)=50V, Width=0.8mm
C20: library part GRM1885C1H332JA01D, "CAP CER 3.3NF 50V C0G/NP0 0603", Capacitance=3.3nF, Case/Package=0603, Case Code (Metric)=1608, Dielectric=C0G, Manufacturer=Murata, Max Operating Temperature=125°C, Min Operating Temperature=-55°C, Package Quantity=4000, Supplier Part Number 1=2470483, Tolerance=5%, Voltage=50V, Case Code (Imperial)=0603, ComponentLink1Description=https://datasheet.ciiva.com/6270/product-6270530.pdf?src-supplier=Digi-Key, ComponentLink1URL=https://datasheet.ciiva.com/6270/product-6270530.pdf?src-supplier=Digi-Key, ComponentLink2Description=https://datasheet.ciiva.com/29202/450783-da-01-en-vs-kondensator-0603-29202805.pdf?src-supplier=Conrad, ComponentLink2URL=https://datasheet.ciiva.com/29202/450783-da-01-en-vs-kondensator-0603-29202805.pdf?src-supplier=Conrad, ComponentLink3Description=https://datasheet.ciiva.com/5417/product-5417082.pdf?src-supplier=Mouser, ComponentLink3URL=https://datasheet.ciiva.com/5417/product-5417082.pdf?src-supplier=Mouser, Depth=0.8mm, Height=0.8mm, Lead Free="Lead Free", Length=1.6mm, Manufacturer Part Number=GRM1885C1H332JA01D, Material=Ceramic, Mount="Surface Mount", Packaging="Tape and Reel", Price=0.0676, Pricing="10=0.141, 100=0.0673, 500=0.038, 1000=0.0309, 2000=0.0305 (EUR)", Radiation Hardening=No, REACH SVHC="No SVHC", RoHS=Yes, Stock=11093, Supplier 1=Farnell, Termination=SMD/SMT, Thickness=0.035inch, Voltage Rating=50V, Voltage Rating (DC)=50V, Width=0.031inch
C22: library part EEEFC1H1R0R, "CAP ALUM 1UF 50V LESR SMD", Capacitance=1uF, Case/Package=Radial, Dielectric Material=Aluminium, ESR (Equivalent Series Resistance)=5R, Leakage Current=3uA, Manufacturer=Panasonic, Max Operating Temperature=105°C, Min Operating Temperature=-40°C, Package Quantity=2000, Ripple Current=30mA, Supplier Part Number 1=9694528, Tolerance=20%, Voltage=50V, ComponentLink1Description=https://datasheet.ciiva.com/11779/0900766b806bc525-11779769.pdf?src-supplier=RSComponents, ComponentLink1URL=https://datasheet.ciiva.com/11779/0900766b806bc525-11779769.pdf?src-supplier=RSComponents, ComponentLink2Description=https://datasheet.ciiva.com/29313/443524-da-01-en-smd-elko-vfc-b-1-0-uf-50v-29313787.pdf?src-supplier=Conrad, ComponentLink2URL=https://datasheet.ciiva.com/29313/443524-da-01-en-smd-elko-vfc-b-1-0-uf-50v-29313787.pdf?src-supplier=Conrad, ComponentLink3Description=https://datasheet.ciiva.com/10331/aba0000ce5-10331045.pdf?src-supplier=Avnet, ComponentLink3URL=https://datasheet.ciiva.com/10331/aba0000ce5-10331045.pdf?src-supplier=Avnet, ComponentLink4Description=https://datasheet.ciiva.com/43485/31718-43485413.pdf?src-supplier=Farnell, ComponentLink4URL=https://datasheet.ciiva.com/43485/31718-43485413.pdf?src-supplier=Farnell, ComponentLink5Description=https://datasheet.ciiva.com/17353/aba0000ce5-17353382.pdf?src-supplier=Avnet+Europe, ComponentLink5URL=https://datasheet.ciiva.com/17353/aba0000ce5-17353382.pdf?src-supplier=Avnet+Europe, ComponentLink6Description=https://datasheet.ciiva.com/24024/aba0000ce5-68492-24024840.pdf?src-supplier=Mouser, ComponentLink6URL=https://datasheet.ciiva.com/24024/aba0000ce5-68492-24024840.pdf?src-supplier=Mouser, ComponentLink7Description=https://datasheet.ciiva.com/48542/eeefc-series-eng-tds-48542747.pdf?src-supplier=Distrelec, ComponentLink7URL=https://datasheet.ciiva.com/48542/eeefc-series-eng-tds-48542747.pdf?src-supplier=Distrelec, ComponentLink8Description=https://datasheet.ciiva.com/30181/aba0000ce5-30181516.pdf?src-supplier=Onlinecomponents.com, ComponentLink8URL=https://datasheet.ciiva.com/30181/aba0000ce5-30181516.pdf?src-supplier=Onlinecomponents.com, ComponentLink9Description=https://datasheet.ciiva.com/14596/70068018-14596941.pdf?src-supplier=Allied+Electronics, ComponentLink9URL=https://datasheet.ciiva.com/14596/70068018-14596941.pdf?src-supplier=Allied+Electronics, ComponentLink10Description=https://datasheet.ciiva.com/46388/31718-46388238.pdf?src-supplier=Element14, ComponentLink10URL=https://datasheet.ciiva.com/46388/31718-46388238.pdf?src-supplier=Element14, ComponentLink11Description=https://datasheet.ciiva.com/14606/70256381-14606527.pdf?src-supplier=Allied+Electronics, ComponentLink11URL=https://datasheet.ciiva.com/14606/70256381-14606527.pdf?src-supplier=Allied+Electronics, Contact Plating=Tin, Diameter=4mm, Height=5.4mm, Height - Seated (Max)=0.213inch, Impedance=5R, Lead Free="Lead Free", Lead Length=1.8mm, Lead Pitch=1mm, Length=5.5mm, Life (Hours)=1000Hour, Manufacturer Part Number=EEEFC1H1R0R, Material=Aluminium, Mount="Surface Mount", Number of Pins=2, Packaging="Tape and Reel", Price=0.151, Pricing 1="5 = 0.29200, 50 = 0.15100, 250 = 0.12600, 500 = 0.09460, 1000 = 0.07990 (EUR)", Radiation Hardening=No, REACH SVHC="No SVHC", Ripple Current (AC)=30mA, RoHS=Yes, Stock 1=3801, Supplier 1=Farnell, Termination=SMD/SMT, Voltage Rating=50V, Voltage Rating (DC)=50V, Width=4.3mm
D1: "DIODE GEN PURP 50V 1A SMA", Average Rectified Current=1A, Capacitance=12pF, Case/Package=SMA, Forward Voltage=1.1V, Manufacturer="ON Semiconductor / Fairchild", Max Forward Surge Current (Ifsm)=30A, Max Operating Temperature=150°C, Max Repetitive Reverse Voltage (Vrrm)=50V, Max Surge Current=40A, Min Operating Temperature=-55°C, Package Quantity=1, Peak Reverse Current=1uA, Power Dissipation=1.4W, Supplier Part Number 1=9843868, ComponentLink1Description=https://datasheet.ciiva.com/910/s1a-910480.pdf?src-supplier=Avnet, ComponentLink1URL=https://datasheet.ciiva.com/910/s1a-910480.pdf?src-supplier=Avnet, ComponentLink2Description=https://datasheet.ciiva.com/23683/1730038-23683616.pdf?src-supplier=Newark, ComponentLink2URL=https://datasheet.ciiva.com/23683/1730038-23683616.pdf?src-supplier=Newark, ComponentLink3Description=https://datasheet.ciiva.com/4452/s1a-191336-4452662.pdf?src-supplier=Mouser, ComponentLink3URL=https://datasheet.ciiva.com/4452/s1a-191336-4452662.pdf?src-supplier=Mouser, ComponentLink4Description=https://datasheet.ciiva.com/25624/0900766b80f9b629-25624903.pdf?src-supplier=RSComponents, ComponentLink4URL=https://datasheet.ciiva.com/25624/0900766b80f9b629-25624903.pdf?src-supplier=RSComponents, ComponentLink5Description=https://datasheet.ciiva.com/916/s1a-916898.pdf?src-supplier=Digi-Key, ComponentLink5URL=https://datasheet.ciiva.com/916/s1a-916898.pdf?src-supplier=Digi-Key, ComponentLink6Description=https://datasheet.ciiva.com/916/s1a-916899.pdf?src-supplier=Digi-Key, ComponentLink6URL=https://datasheet.ciiva.com/916/s1a-916899.pdf?src-supplier=Digi-Key, ComponentLink7Description=https://datasheet.ciiva.com/916/s1a-916900.pdf?src-supplier=Digi-Key, ComponentLink7URL=https://datasheet.ciiva.com/916/s1a-916900.pdf?src-supplier=Digi-Key, ComponentLink8Description=https://datasheet.ciiva.com/16800/s1a-16800103.pdf?src-supplier=Future+Electronics, ComponentLink8URL=https://datasheet.ciiva.com/16800/s1a-16800103.pdf?src-supplier=Future+Electronics, ComponentLink9Description=https://datasheet.ciiva.com/28469/1766308-28469031.pdf?src-supplier=Element14, ComponentLink9URL=https://datasheet.ciiva.com/28469/1766308-28469031.pdf?src-supplier=Element14, ComponentLink10Description=https://datasheet.ciiva.com/26231/s1k-26231832.pdf?src-supplier=Avnet+Europe, ComponentLink10URL=https://datasheet.ciiva.com/26231/s1k-26231832.pdf?src-supplier=Avnet+Europe, ComponentLink11Description=https://datasheet.ciiva.com/16474/s1k-16474283.pdf?src-supplier=Avnet+Asia, ComponentLink11URL=https://datasheet.ciiva.com/16474/s1k-16474283.pdf?src-supplier=Avnet+Asia, Contact Plating=Tin, Current Rating=1A, Element Configuration=Single, Forward Current=1A, Lead Free="Lead Free", Manufacturer Part Number=S1A, Max Reverse Voltage (DC)=50V, Mount="Surface Mount", Number of Pins=2, Output Current=1A, Packaging="Tape and Reel", Peak Non-Repetitive Surge Current=30A, Polarity=Standard, Price=0.072, Pricing="5=0.184, 25=0.179, 100=0.0727, 250=0.0669, 500=0.0667, 1000=0.0364, 5000=0.0293 (EUR)", Radiation Hardening=No, REACH SVHC="No SVHC", Recovery Time=1800ns, Reverse Recovery Time=1.8us, Reverse Voltage=50V, RoHS=Yes, Stock=34555, Supplier 1=Farnell, Voltage Rating (DC)=50V, Weight=0.106g, Width=5.28mm
D2: "DIODE GEN PURP 75V 150MA SOD323F", Average Rectified Current=150mA, Forward Voltage=1V, Manufacturer="ON Semiconductor / Fairchild", Max Forward Surge Current (Ifsm)=2A, Max Operating Temperature=150°C, Max Repetitive Reverse Voltage (Vrrm)=75V, Min Operating Temperature=-55°C, Package Quantity=1, Peak Reverse Current=5uA, Power Dissipation=200mW, Supplier Part Number 1=2453269, ComponentLink1Description=https://datasheet.ciiva.com/25968/1n914bws-25968945.pdf?src-supplier=Avnet+Europe, ComponentLink1URL=https://datasheet.ciiva.com/25968/1n914bws-25968945.pdf?src-supplier=Avnet+Europe, ComponentLink2Description=https://datasheet.ciiva.com/30479/0900766b810e1cd3-30479206.pdf?src-supplier=RSComponents, ComponentLink2URL=https://datasheet.ciiva.com/30479/0900766b810e1cd3-30479206.pdf?src-supplier=RSComponents, ComponentLink3Description=https://datasheet.ciiva.com/15208/getdatasheetpartid-127819-15208358.pdf?src-supplier=Verical, ComponentLink3URL=https://datasheet.ciiva.com/15208/getdatasheetpartid-127819-15208358.pdf?src-supplier=Verical, ComponentLink4Description=https://datasheet.ciiva.com/8300/1n914bws-8300360.pdf?src-supplier=Avnet, ComponentLink4URL=https://datasheet.ciiva.com/8300/1n914bws-8300360.pdf?src-supplier=Avnet, ComponentLink5Description=https://datasheet.ciiva.com/910/1n4148ws-910380.pdf?src-supplier=Digi-Key, ComponentLink5URL=https://datasheet.ciiva.com/910/1n4148ws-910380.pdf?src-supplier=Digi-Key, ComponentLink6Description=https://datasheet.ciiva.com/910/1n4148ws-910381.pdf?src-supplier=Digi-Key, ComponentLink6URL=https://datasheet.ciiva.com/910/1n4148ws-910381.pdf?src-supplier=Digi-Key, ComponentLink7Description=https://datasheet.ciiva.com/910/1n4148ws-910382.pdf?src-supplier=Digi-Key, ComponentLink7URL=https://datasheet.ciiva.com/910/1n4148ws-910382.pdf?src-supplier=Digi-Key, Contact Plating=Tin, Element Configuration=Single, Forward Current=150mA, Height=1mm, Lead Free="Lead Free", Length=1.8mm, Manufacturer Part Number=1N4148WS, Max Reverse Voltage (DC)=75V, Mount="Surface Mount", Number of Pins=2, Packaging="Tape and Reel", Price=0.0521, Pricing="5=0.155, 25=0.151, 100=0.0529, 250=0.0498, 500=0.0477, 1000=0.0243, 5000=0.0193 (EUR)", Radiation Hardening=No, REACH SVHC="No SVHC", Recovery Time=4ns, Reverse Recovery Time=4ns, Reverse Voltage=75V, RoHS=Yes, Stock=379338, Supplier 1=Farnell, Weight=0.0276g, Width=1.35mm
D3 D4: "LED", Package=T1, Dimensions=3mm, Price=0.01
D5 D6: library part D_1N34A, Package=DO-7, PinSpacing=7.62mm, Price=0.2
D7 D8: library part D_1N4148, Package=DO-35, PinSpacing=5.08mm, Price=0.01
DC FSW LED: "2 Pins male XH header", Price=0.1
GAIN TONE VOL: library part POT_100kA_ALPHA_16mm, "100k Log potentiometer round shaft", Package="PCB Mounted", Dimensions=16mm, Price=0.5
IC1: library part OP07CDRG4, "IC OPAMP GP 600KHZ 8SOIC", Case/Package=D, Dual Supply Voltage=9V, Input Bias Current=7nA, Input Offset Voltage (Vos)=150uV, Manufacturer="Texas Instruments", Max Dual Supply Voltage=18V, Max Operating Temperature=70°C, Min Dual Supply Voltage=3V, Min Operating Temperature=0°C, Nominal Supply Current=5mA, Package Quantity=2500, Supplier Part Number 1=2769315, Voltage Gain=112.04dB, Bandwidth=600kHz, Common Mode Rejection Ratio=100dB, ComponentLink1Description=https://datasheet.ciiva.com/1811/op07c-1811542.pdf?src-supplier=Digi-Key, ComponentLink1URL=https://datasheet.ciiva.com/1811/op07c-1811542.pdf?src-supplier=Digi-Key, Gain Bandwidth Product=600kHz, Height=1.58mm, Lead Free="Lead Free", Length=4.9mm, Manufacturer Part Number=OP07CDRG4, Max I/O Voltage=150uV, Nominal Gain Bandwidth Product=600kHz, Number of Channels=1, Number of Circuits=1, Number of Elements=1, Number of Pins=8, Operating Supply Voltage=18V, Packaging="Tape and Reel", Price=0.623, Pricing="1=0.623, 50=0.544, 100=0.351, 250=0.328, 500=0.304, 1000=0.281, 2500=0.254, 5000=0.233 (EUR)", Radiation Hardening=No, RoHS=Yes, Slew Rate=0.3V/µs, Stock=2476, Supplier 1=Farnell, Unity Gain Bandwidth Product=600kHz, Width=3.91mm
INPUT OUTPUT: "6.35mm stereo insulated socket jack PCB mounted", Price=0.5
K1: library part G6K-2F5DC, "OMRON - G6K-2F 5DC - RELAY, SIGNAL, DPDT, 30VDC, 1A", Case/Package=SMD/SMT, Coil Current=21.1mA, Coil Power=100mW, Coil Resistance=237R, Coil Voltage (DC)=5V, Contact Current Rating=1A, Contact Resistance=100mR, Insulation Resistance=1GR, Manufacturer=Cliff, Max Operating Temperature=70°C, Min Operating Temperature=-40°C, Supplier Part Number 1=4446185, Coil Type=Non-Latching, ComponentLink1Description=https://datasheet.ciiva.com/1524/1702879-1524968.pdf?src-supplier=Element14, ComponentLink1URL=https://datasheet.ciiva.com/1524/1702879-1524968.pdf?src-supplier=Element14, Contact Material=Gold, Current Rating=21.1mA, Depth=7.8mm, Height=5.2mm, Length=10mm, Manufacturer Part Number=G6K-2F5DC, Mount=PCB, Number of Poles=2, Power Rating=100mW, Price=2.68, REACH SVHC=Unknown, Release Time=1.3ms, RoHS=Yes, Stock=0, Supplier 1=Farnell, Termination=SMD/SMT, Width=10mm
K2: "Toshiba TLP175A AC Input MOSFET Output Optocoupler, Surface Mount, 4-Pin SOIC", Case/Package=SOIC, Isolation Voltage=3.75kV, Manufacturer=Toshiba, Max Input Current=80mA, Supplier Part Number 1=2524257, ComponentLink1Description=http://www.farnell.com/datasheets/2017792.pdf?src-supplier=Farnell, ComponentLink1URL=http://www.farnell.com/datasheets/2017792.pdf?src-supplier=Farnell, ComponentLink2Description=http://uk.rs-online.com/webdocs/129d/0900766b8129d5be.pdf?src-supplier=RSComponents, ComponentLink2URL=http://uk.rs-online.com/webdocs/129d/0900766b8129d5be.pdf?src-supplier=RSComponents, ComponentLink3Description=http://www.farnell.com/datasheets/2017792.pdf?src-supplier=Element14, ComponentLink3URL=http://www.farnell.com/datasheets/2017792.pdf?src-supplier=Element14, ComponentLink4Description=http://www.farnell.com/datasheets/2017792.pdf?src-supplier=Newark, ComponentLink4URL=http://www.farnell.com/datasheets/2017792.pdf?src-supplier=Newark, Fall Time=1ms, Manufacturer Part Number=TLP175A, Mount="Surface Mount", Number of Channels=1, Number of Pins=4, Price=0.829, Pricing="5=0.877, 25=0.717, 100=0.597, 250=0.546, 500=0.49, 1000=0.441 (EUR)", REACH SVHC=Unknown, Rise Time=1ms, RoHS=No, Stock=0, Supplier 1=Farnell
MELLOW: library part SW_SLIDE_DPDT_ON-ON, "DPDT slide switch ON/ON", Price=0.5
MODE: library part J_HEADER_2PINS, "2 Pins male header", Pin spacing=2.54mm, Price=0.01
PROG: "4 Pins female header", Pin spacing=2.54mm, Price=0.01